# EAGLE board FTDI_SmartBasic-GiantPanel-v11 (EAGLE 6.6.0), part 1 of 12
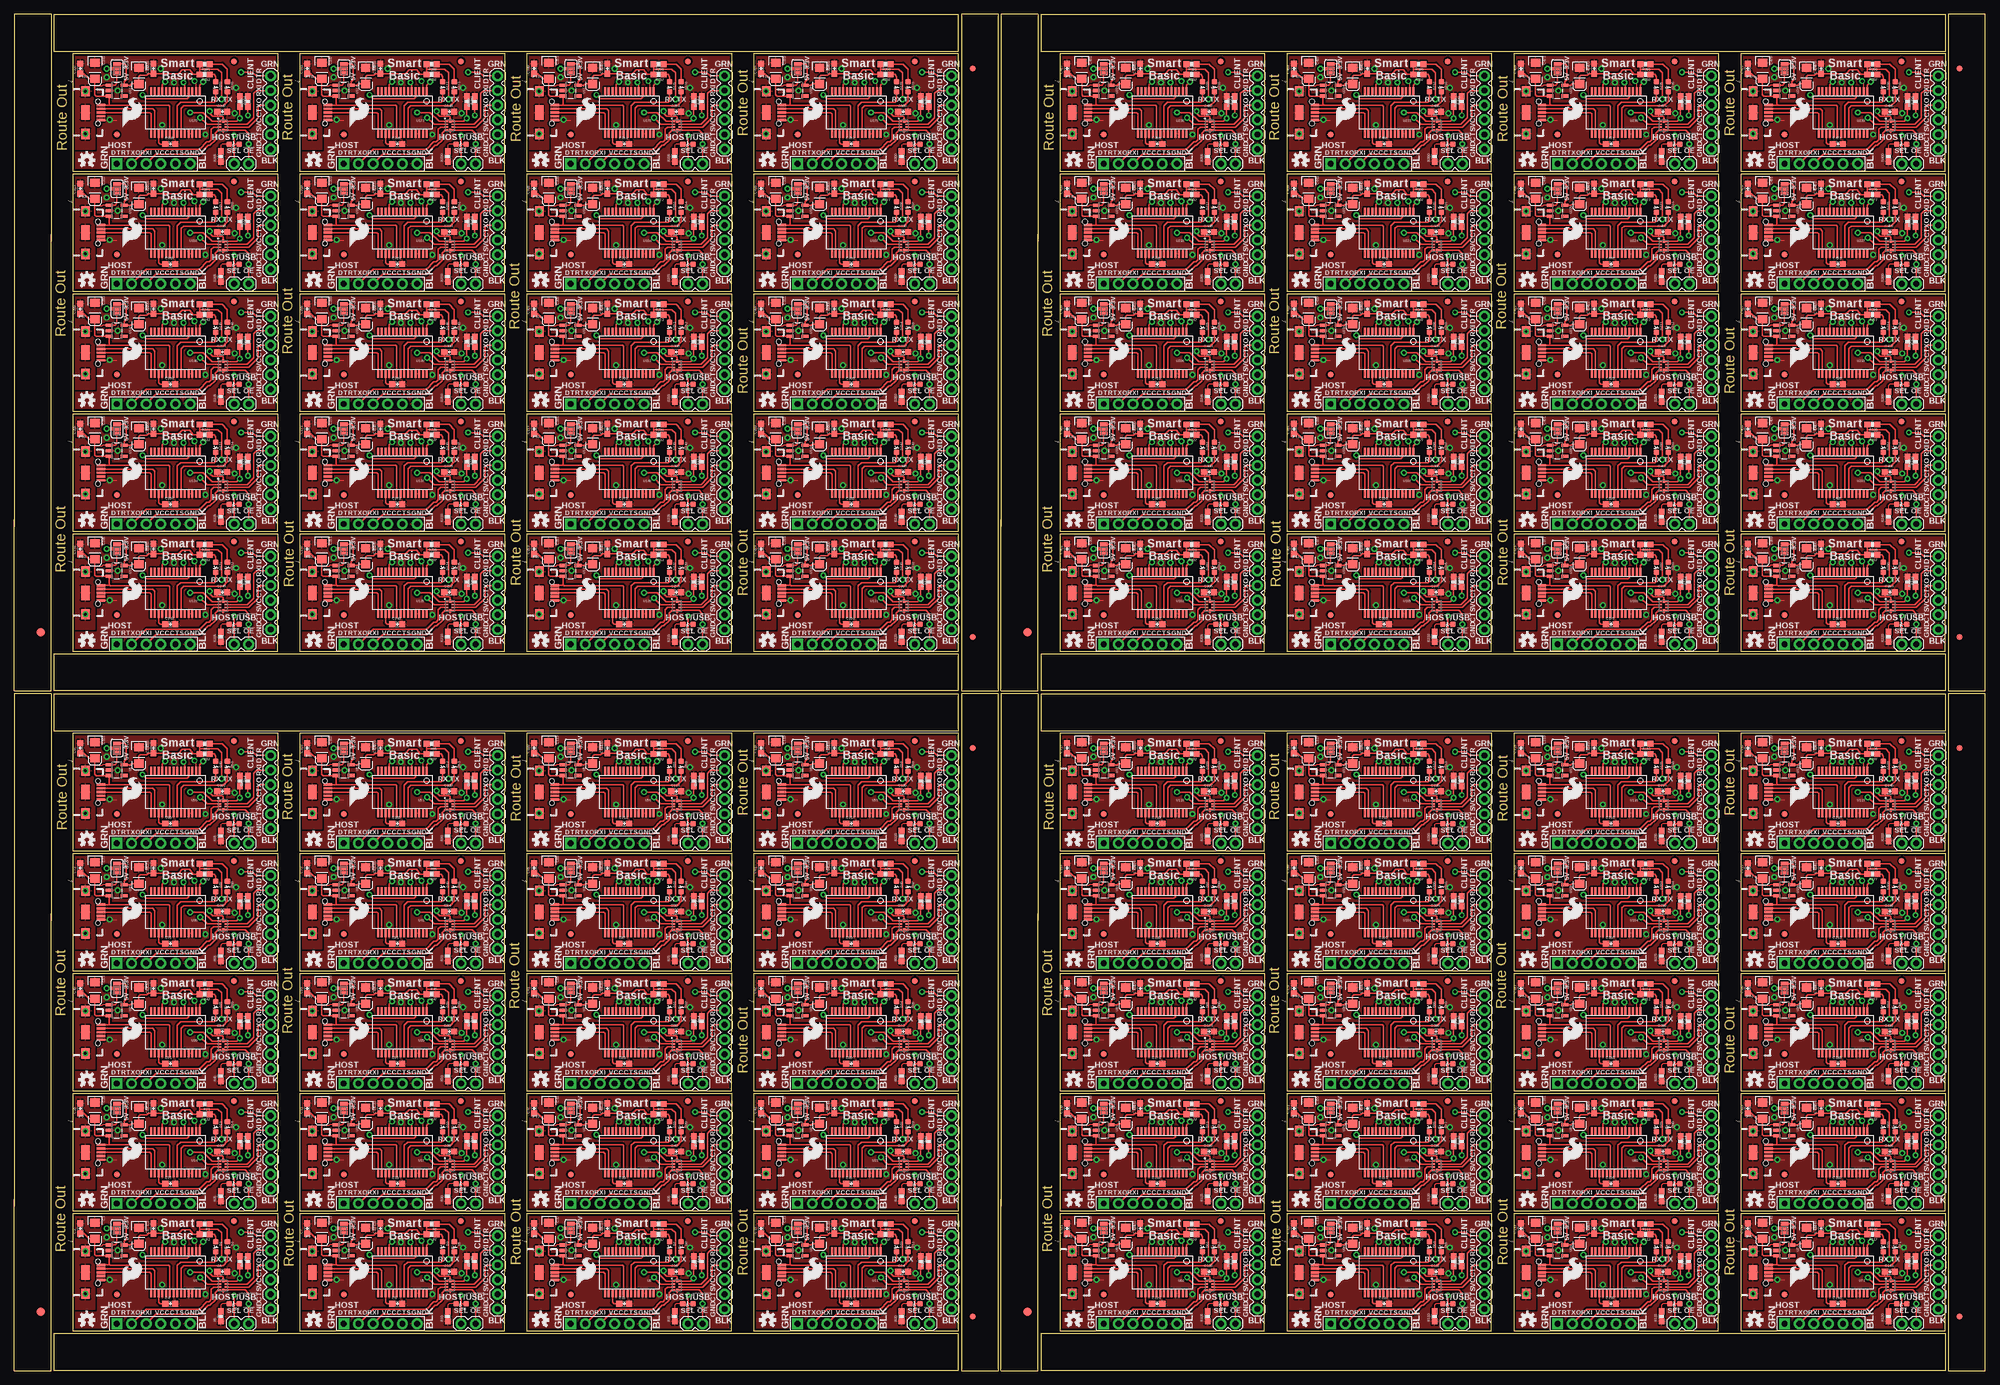
[diagram p0: board, top side]
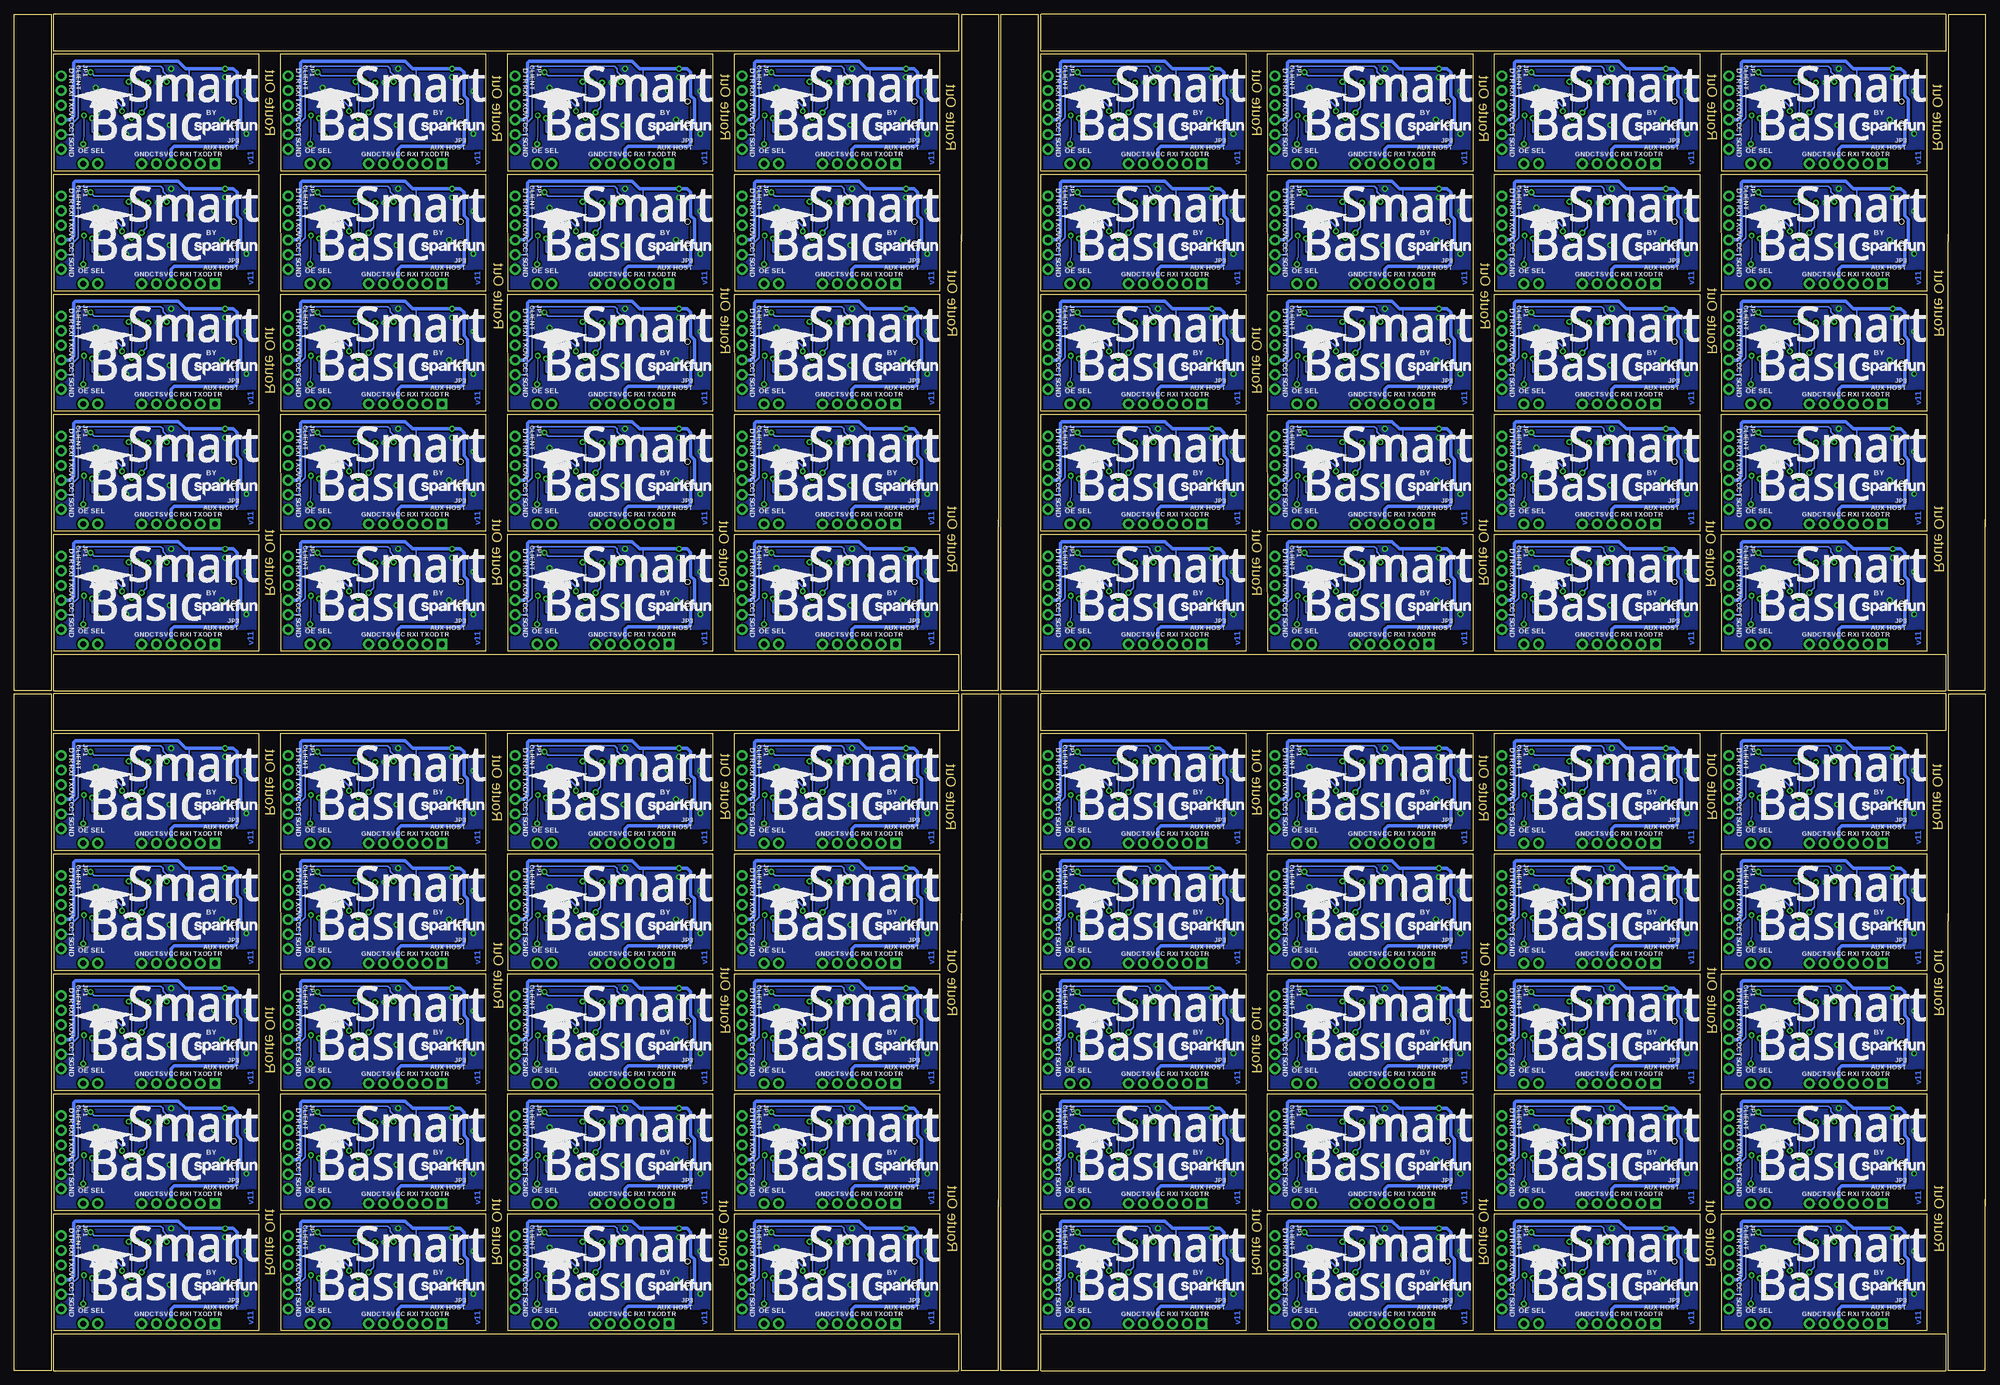
[diagram p1: board, bottom side, seen from below]

Size 341.88 x 235.2 mm. Coordinates in mm from the lower left corner, seen from the top.
Outline: 392 segments
Copper layers (1*16): Top 0.035mm / dielectric 1.5mm / Bottom 0.035mm
Design rules "Sparkfun *": minimum track width 8mil, minimum drill 20mil, track to track 8mil, track to pad 8mil, pad to pad 8mil, via to via 8mil, smd to smd 8mil, copper to edge 8mil, drill to drill 8mil, minimum pad ring 12mil, minimum via ring 10mil, stop-mask expansion 4mil, vias tented up to drill 20mil, thermal gap 10mil

## Footprints (pad centres in the part's own frame; a part is rotated, then mirrored left to right if it is on the bottom)
EIA3216 = smd 1.4 x 1.6: A 1.4,0; C -1.4,0
0603-CAP = smd 1.1 x 1: 1 -0.85,0; 2 0.85,0
FTDI_BASIC = drill 1.016 pad 1.88: CTS 10.16,0; DTR 0,0; GND 12.7,0; RXI 2.54,0; TXO 5.08,0; VCC 7.62,0
LED-0603 = smd 1 x 1: A 0,-0.877; C 0,0.877
FIDUCIAL-1.5X3 = smd 1.5 x 1.5: 1 0,0
FIDUCIAL-1X2 = smd 1 x 1: 1 0,0
FTDI_DEVICE_SIDE = drill 1.016 pad 1.88 square: P$1 -6.35,0 | drill 1.016 pad 1.88: P$2 -3.81,0; P$3 -1.27,0; P$4 1.27,0; P$5 3.81,0; P$6 6.35,0
USB-B-MICRO-SMD_V03 = smd 1.4 x 0.4: D+1 2.7,0; D-1 2.7,0.65; GND1 2.7,-1.3; ID1 2.7,-0.65; VBUS1 2.7,1.3 | smd 1.5 x 1.8: SHIELD1 0,3.7; SHIELD2 0,-3.7 | smd 1.5 x 2.5: SHIELD3 0,0 | hole 0.85: 2.2,1.9; 2.2,-1.9
1X02 = drill 1.016 pad 1.88: 1 0,0; 2 2.54,0
0603-RES = smd 1.1 x 1: 1 -0.85,0; 2 0.85,0
PAD-JUMPER-3-2OF3_NC_BY_PASTE_YES_SILK_FULL_BOX = smd 0.635 x 1.27: 1 -0.813,0; 2 0,0; 3 0.813,0
SSOP28DB = smd 0.348 x 1.397: 1 -4.225,-3.656; 2 -3.575,-3.656; 3 -2.925,-3.656; 4 -2.275,-3.656; 5 -1.625,-3.656; 6 -0.975,-3.656; 7 -0.325,-3.656; 8 0.325,-3.656; 9 0.975,-3.656; 10 1.625,-3.656; 11 2.275,-3.656; 12 2.925,-3.656; 13 3.575,-3.656; 14 4.225,-3.656; 15 4.225,3.656; 16 3.575,3.656; 17 2.925,3.656; 18 2.275,3.656; 19 1.625,3.656; 20 0.975,3.656; 21 0.325,3.656; 22 -0.325,3.656; 23 -0.975,3.656; 24 -1.625,3.656; 25 -2.275,3.656; 26 -2.925,3.656; 27 -3.575,3.656; 28 -4.225,3.656
SOT23-5 = smd 0.55 x 1.2: 1 -0.95,-1.3; 2 0,-1.3; 3 0.95,-1.3; 4 0.95,1.3; 5 -0.95,1.3
QFN-10-RSE = smd 0.58 x 0.25: 1 -0.6,0.75; 2 -0.6,0.25; 3 -0.6,-0.25; 4 -0.6,-0.75; 6 0.6,-0.75; 7 0.6,-0.25; 8 0.6,0.25; 9 0.6,0.75 | smd 0.35 x 0.63: 5 0,-0.85; 10 0,0.85

## Placement (x,y rotation side)
C1  10uF  [EIA3216]  13.97,24.26 270 top
C2  0.1uF  [0603-CAP]  11.43,24.64 90 top
C3  10uF  [EIA3216]  21.59,23.37 270 top
C4  0.1uF  [0603-CAP]  27.05,11.56 0 top
C5  0.1uF  [0603-CAP]  24.13,24.64 90 top
C6  0.1uF  [0603-CAP]  36.07,17.14 0 top
C7  0.1uF  [0603-CAP]  50.8,24.64 90 top
C8  10uF  [EIA3216]  60.96,23.37 270 top
C9  0.1uF  [0603-CAP]  66.42,11.56 0 top
C10  0.1uF  [0603-CAP]  63.5,24.64 90 top
C11  10uF  [EIA3216]  53.34,24.26 270 top
C12  0.1uF  [0603-CAP]  75.44,17.14 0 top
C13  0.1uF  [0603-CAP]  90.17,24.64 90 top
C14  10uF  [EIA3216]  100.33,23.37 270 top
C15  0.1uF  [0603-CAP]  105.79,11.56 0 top
C16  0.1uF  [0603-CAP]  102.87,24.64 90 top
C17  10uF  [EIA3216]  92.71,24.26 270 top
C18  0.1uF  [0603-CAP]  114.81,17.14 0 top
C19  0.1uF  [0603-CAP]  129.54,24.64 90 top
C20  10uF  [EIA3216]  139.7,23.37 270 top
C21  0.1uF  [0603-CAP]  145.16,11.56 0 top
C22  0.1uF  [0603-CAP]  142.24,24.64 90 top
C23  10uF  [EIA3216]  132.08,24.26 270 top
C24  0.1uF  [0603-CAP]  154.18,17.14 0 top
C25  0.1uF  [0603-CAP]  11.43,45.47 90 top
C26  10uF  [EIA3216]  21.59,44.2 270 top
C27  0.1uF  [0603-CAP]  27.05,32.38 0 top
C28  0.1uF  [0603-CAP]  24.13,45.47 90 top
C29  10uF  [EIA3216]  13.97,45.09 270 top
C30  0.1uF  [0603-CAP]  36.07,37.97 0 top
C31  0.1uF  [0603-CAP]  50.8,45.47 90 top
C32  10uF  [EIA3216]  60.96,44.2 270 top
C33  0.1uF  [0603-CAP]  66.42,32.38 0 top
C34  0.1uF  [0603-CAP]  63.5,45.47 90 top
C35  10uF  [EIA3216]  53.34,45.09 270 top
C36  0.1uF  [0603-CAP]  75.44,37.97 0 top
C37  0.1uF  [0603-CAP]  90.17,45.47 90 top
C38  10uF  [EIA3216]  100.33,44.2 270 top
C39  0.1uF  [0603-CAP]  105.79,32.38 0 top
C40  0.1uF  [0603-CAP]  102.87,45.47 90 top
C41  10uF  [EIA3216]  92.71,45.09 270 top
C42  0.1uF  [0603-CAP]  114.81,37.97 0 top
C43  0.1uF  [0603-CAP]  129.54,45.47 90 top
C44  10uF  [EIA3216]  139.7,44.2 270 top
C45  0.1uF  [0603-CAP]  145.16,32.38 0 top
C46  0.1uF  [0603-CAP]  142.24,45.47 90 top
C47  10uF  [EIA3216]  132.08,45.09 270 top
C48  0.1uF  [0603-CAP]  154.18,37.97 0 top
C49  0.1uF  [0603-CAP]  11.43,66.29 90 top
C50  10uF  [EIA3216]  21.59,65.02 270 top
C51  0.1uF  [0603-CAP]  27.05,53.21 0 top
C52  0.1uF  [0603-CAP]  24.13,66.29 90 top
C53  10uF  [EIA3216]  13.97,65.91 270 top
C54  0.1uF  [0603-CAP]  36.07,58.8 0 top
C55  0.1uF  [0603-CAP]  50.8,66.29 90 top
C56  10uF  [EIA3216]  60.96,65.02 270 top
C57  0.1uF  [0603-CAP]  66.42,53.21 0 top
C58  0.1uF  [0603-CAP]  63.5,66.29 90 top
C59  10uF  [EIA3216]  53.34,65.91 270 top
C60  0.1uF  [0603-CAP]  75.44,58.8 0 top
C61  0.1uF  [0603-CAP]  90.17,66.29 90 top
C62  10uF  [EIA3216]  100.33,65.02 270 top
C63  0.1uF  [0603-CAP]  105.79,53.21 0 top
C64  0.1uF  [0603-CAP]  102.87,66.29 90 top
C65  10uF  [EIA3216]  92.71,65.91 270 top
C66  0.1uF  [0603-CAP]  114.81,58.8 0 top
C67  0.1uF  [0603-CAP]  129.54,66.29 90 top
C68  10uF  [EIA3216]  139.7,65.02 270 top
C69  0.1uF  [0603-CAP]  145.16,53.21 0 top
C70  0.1uF  [0603-CAP]  142.24,66.29 90 top
C71  10uF  [EIA3216]  132.08,65.91 270 top
C72  0.1uF  [0603-CAP]  154.18,58.8 0 top
C73  0.1uF  [0603-CAP]  11.43,87.12 90 top
C74  10uF  [EIA3216]  21.59,85.85 270 top
C75  0.1uF  [0603-CAP]  27.05,74.04 0 top
C76  0.1uF  [0603-CAP]  24.13,87.12 90 top
C77  10uF  [EIA3216]  13.97,86.74 270 top
C78  0.1uF  [0603-CAP]  36.07,79.63 0 top
C79  0.1uF  [0603-CAP]  50.8,87.12 90 top
C80  10uF  [EIA3216]  60.96,85.85 270 top
C81  0.1uF  [0603-CAP]  66.42,74.04 0 top
C82  0.1uF  [0603-CAP]  63.5,87.12 90 top
C83  10uF  [EIA3216]  53.34,86.74 270 top
C84  0.1uF  [0603-CAP]  75.44,79.63 0 top
C85  0.1uF  [0603-CAP]  90.17,87.12 90 top
C86  10uF  [EIA3216]  100.33,85.85 270 top
C87  0.1uF  [0603-CAP]  105.79,74.04 0 top
C88  0.1uF  [0603-CAP]  102.87,87.12 90 top
C89  10uF  [EIA3216]  92.71,86.74 270 top
C90  0.1uF  [0603-CAP]  114.81,79.63 0 top
C91  0.1uF  [0603-CAP]  129.54,87.12 90 top
C92  10uF  [EIA3216]  139.7,85.85 270 top
C93  0.1uF  [0603-CAP]  145.16,74.04 0 top
C94  0.1uF  [0603-CAP]  142.24,87.12 90 top
C95  10uF  [EIA3216]  132.08,86.74 270 top
C96  0.1uF  [0603-CAP]  154.18,79.63 0 top
C97  0.1uF  [0603-CAP]  11.43,107.95 90 top
C98  10uF  [EIA3216]  21.59,106.68 270 top
C99  0.1uF  [0603-CAP]  27.05,94.87 0 top
C100  0.1uF  [0603-CAP]  24.13,107.95 90 top
C101  10uF  [EIA3216]  13.97,107.57 270 top
C102  0.1uF  [0603-CAP]  36.07,100.46 0 top
C103  0.1uF  [0603-CAP]  50.8,107.95 90 top
C104  10uF  [EIA3216]  60.96,106.68 270 top
C105  0.1uF  [0603-CAP]  66.42,94.87 0 top
C106  0.1uF  [0603-CAP]  63.5,107.95 90 top
C107  10uF  [EIA3216]  53.34,107.57 270 top
C108  0.1uF  [0603-CAP]  75.44,100.46 0 top
C109  0.1uF  [0603-CAP]  90.17,107.95 90 top
C110  10uF  [EIA3216]  100.33,106.68 270 top
C111  0.1uF  [0603-CAP]  105.79,94.87 0 top
C112  0.1uF  [0603-CAP]  102.87,107.95 90 top
C113  10uF  [EIA3216]  92.71,107.57 270 top
C114  0.1uF  [0603-CAP]  114.81,100.46 0 top
C115  0.1uF  [0603-CAP]  129.54,107.95 90 top
C116  10uF  [EIA3216]  139.7,106.68 270 top
C117  0.1uF  [0603-CAP]  145.16,94.87 0 top
C118  0.1uF  [0603-CAP]  142.24,107.95 90 top
C119  10uF  [EIA3216]  132.08,107.57 270 top
C120  0.1uF  [0603-CAP]  154.18,100.46 0 top
C121  0.1uF  [0603-CAP]  182.63,24.64 90 top
C122  10uF  [EIA3216]  192.79,23.37 270 top
C123  0.1uF  [0603-CAP]  198.25,11.56 0 top
C124  0.1uF  [0603-CAP]  195.33,24.64 90 top
C125  10uF  [EIA3216]  185.17,24.26 270 top
C126  0.1uF  [0603-CAP]  207.26,17.14 0 top
C127  0.1uF  [0603-CAP]  222,24.64 90 top
C128  10uF  [EIA3216]  232.16,23.37 270 top
C129  0.1uF  [0603-CAP]  237.62,11.56 0 top
C130  0.1uF  [0603-CAP]  234.7,24.64 90 top
C131  10uF  [EIA3216]  224.54,24.26 270 top
C132  0.1uF  [0603-CAP]  246.63,17.14 0 top
C133  0.1uF  [0603-CAP]  261.37,24.64 90 top
C134  10uF  [EIA3216]  271.53,23.37 270 top
C135  0.1uF  [0603-CAP]  276.99,11.56 0 top
C136  0.1uF  [0603-CAP]  274.07,24.64 90 top
C137  10uF  [EIA3216]  263.91,24.26 270 top
C138  0.1uF  [0603-CAP]  286,17.14 0 top
C139  0.1uF  [0603-CAP]  300.74,24.64 90 top
C140  10uF  [EIA3216]  310.9,23.37 270 top
C141  0.1uF  [0603-CAP]  316.36,11.56 0 top
C142  0.1uF  [0603-CAP]  313.44,24.64 90 top
C143  10uF  [EIA3216]  303.28,24.26 270 top
C144  0.1uF  [0603-CAP]  325.37,17.14 0 top
C145  0.1uF  [0603-CAP]  182.63,45.47 90 top
C146  10uF  [EIA3216]  192.79,44.2 270 top
C147  0.1uF  [0603-CAP]  198.25,32.38 0 top
C148  0.1uF  [0603-CAP]  195.33,45.47 90 top
C149  10uF  [EIA3216]  185.17,45.09 270 top
C150  0.1uF  [0603-CAP]  207.26,37.97 0 top
C151  0.1uF  [0603-CAP]  222,45.47 90 top
C152  10uF  [EIA3216]  232.16,44.2 270 top
C153  0.1uF  [0603-CAP]  237.62,32.38 0 top
C154  0.1uF  [0603-CAP]  234.7,45.47 90 top
C155  10uF  [EIA3216]  224.54,45.09 270 top
C156  0.1uF  [0603-CAP]  246.63,37.97 0 top
C157  0.1uF  [0603-CAP]  261.37,45.47 90 top
C158  10uF  [EIA3216]  271.53,44.2 270 top
C159  0.1uF  [0603-CAP]  276.99,32.38 0 top
C160  0.1uF  [0603-CAP]  274.07,45.47 90 top
C161  10uF  [EIA3216]  263.91,45.09 270 top
C162  0.1uF  [0603-CAP]  286,37.97 0 top
C163  0.1uF  [0603-CAP]  300.74,45.47 90 top
C164  10uF  [EIA3216]  310.9,44.2 270 top
C165  0.1uF  [0603-CAP]  316.36,32.38 0 top
C166  0.1uF  [0603-CAP]  313.44,45.47 90 top
C167  10uF  [EIA3216]  303.28,45.09 270 top
C168  0.1uF  [0603-CAP]  325.37,37.97 0 top
C169  0.1uF  [0603-CAP]  182.63,66.29 90 top
C170  10uF  [EIA3216]  192.79,65.02 270 top
C171  0.1uF  [0603-CAP]  198.25,53.21 0 top
C172  0.1uF  [0603-CAP]  195.33,66.29 90 top
C173  10uF  [EIA3216]  185.17,65.91 270 top
C174  0.1uF  [0603-CAP]  207.26,58.8 0 top
C175  0.1uF  [0603-CAP]  222,66.29 90 top
C176  10uF  [EIA3216]  232.16,65.02 270 top
C177  0.1uF  [0603-CAP]  237.62,53.21 0 top
C178  0.1uF  [0603-CAP]  234.7,66.29 90 top
C179  10uF  [EIA3216]  224.54,65.91 270 top
C180  0.1uF  [0603-CAP]  246.63,58.8 0 top
C181  0.1uF  [0603-CAP]  261.37,66.29 90 top
C182  10uF  [EIA3216]  271.53,65.02 270 top
C183  0.1uF  [0603-CAP]  276.99,53.21 0 top
C184  0.1uF  [0603-CAP]  274.07,66.29 90 top
C185  10uF  [EIA3216]  263.91,65.91 270 top
C186  0.1uF  [0603-CAP]  286,58.8 0 top
C187  0.1uF  [0603-CAP]  300.74,66.29 90 top
C188  10uF  [EIA3216]  310.9,65.02 270 top
C189  0.1uF  [0603-CAP]  316.36,53.21 0 top
C190  0.1uF  [0603-CAP]  313.44,66.29 90 top
C191  10uF  [EIA3216]  303.28,65.91 270 top
C192  0.1uF  [0603-CAP]  325.37,58.8 0 top
C193  0.1uF  [0603-CAP]  182.63,87.12 90 top
C194  10uF  [EIA3216]  192.79,85.85 270 top
C195  0.1uF  [0603-CAP]  198.25,74.04 0 top
C196  0.1uF  [0603-CAP]  195.33,87.12 90 top
C197  10uF  [EIA3216]  185.17,86.74 270 top
C198  0.1uF  [0603-CAP]  207.26,79.63 0 top
C199  0.1uF  [0603-CAP]  222,87.12 90 top
C200  10uF  [EIA3216]  232.16,85.85 270 top
C201  0.1uF  [0603-CAP]  237.62,74.04 0 top
C202  0.1uF  [0603-CAP]  234.7,87.12 90 top
C203  10uF  [EIA3216]  224.54,86.74 270 top
C204  0.1uF  [0603-CAP]  246.63,79.63 0 top
C205  0.1uF  [0603-CAP]  261.37,87.12 90 top
C206  10uF  [EIA3216]  271.53,85.85 270 top
C207  0.1uF  [0603-CAP]  276.99,74.04 0 top
C208  0.1uF  [0603-CAP]  274.07,87.12 90 top
C209  10uF  [EIA3216]  263.91,86.74 270 top
C210  0.1uF  [0603-CAP]  286,79.63 0 top
C211  0.1uF  [0603-CAP]  300.74,87.12 90 top
C212  10uF  [EIA3216]  310.9,85.85 270 top
C213  0.1uF  [0603-CAP]  316.36,74.04 0 top
C214  0.1uF  [0603-CAP]  313.44,87.12 90 top
C215  10uF  [EIA3216]  303.28,86.74 270 top
C216  0.1uF  [0603-CAP]  325.37,79.63 0 top
C217  0.1uF  [0603-CAP]  182.63,107.95 90 top
C218  10uF  [EIA3216]  192.79,106.68 270 top
C219  0.1uF  [0603-CAP]  198.25,94.87 0 top
C220  0.1uF  [0603-CAP]  195.33,107.95 90 top
C221  10uF  [EIA3216]  185.17,107.57 270 top
C222  0.1uF  [0603-CAP]  207.26,100.46 0 top
C223  0.1uF  [0603-CAP]  222,107.95 90 top
C224  10uF  [EIA3216]  232.16,106.68 270 top
C225  0.1uF  [0603-CAP]  237.62,94.87 0 top
C226  0.1uF  [0603-CAP]  234.7,107.95 90 top
C227  10uF  [EIA3216]  224.54,107.57 270 top
C228  0.1uF  [0603-CAP]  246.63,100.46 0 top
C229  0.1uF  [0603-CAP]  261.37,107.95 90 top
C230  10uF  [EIA3216]  271.53,106.68 270 top
C231  0.1uF  [0603-CAP]  276.99,94.87 0 top
C232  0.1uF  [0603-CAP]  274.07,107.95 90 top
C233  10uF  [EIA3216]  263.91,107.57 270 top
C234  0.1uF  [0603-CAP]  286,100.46 0 top
C235  0.1uF  [0603-CAP]  300.74,107.95 90 top
C236  10uF  [EIA3216]  310.9,106.68 270 top
C237  0.1uF  [0603-CAP]  316.36,94.87 0 top
C238  0.1uF  [0603-CAP]  313.44,107.95 90 top
C239  10uF  [EIA3216]  303.28,107.57 270 top
C240  0.1uF  [0603-CAP]  325.37,100.46 0 top
C241  0.1uF  [0603-CAP]  11.43,142.49 90 top
C242  10uF  [EIA3216]  21.59,141.22 270 top
C243  0.1uF  [0603-CAP]  27.05,129.41 0 top
C244  0.1uF  [0603-CAP]  24.13,142.49 90 top
C245  10uF  [EIA3216]  13.97,142.11 270 top
C246  0.1uF  [0603-CAP]  36.07,135 0 top
C247  0.1uF  [0603-CAP]  50.8,142.49 90 top
C248  10uF  [EIA3216]  60.96,141.22 270 top
C249  0.1uF  [0603-CAP]  66.42,129.41 0 top
C250  0.1uF  [0603-CAP]  63.5,142.49 90 top
C251  10uF  [EIA3216]  53.34,142.11 270 top
C252  0.1uF  [0603-CAP]  75.44,135 0 top
C253  0.1uF  [0603-CAP]  90.17,142.49 90 top
C254  10uF  [EIA3216]  100.33,141.22 270 top
C255  0.1uF  [0603-CAP]  105.79,129.41 0 top
C256  0.1uF  [0603-CAP]  102.87,142.49 90 top
C257  10uF  [EIA3216]  92.71,142.11 270 top
C258  0.1uF  [0603-CAP]  114.81,135 0 top
C259  0.1uF  [0603-CAP]  129.54,142.49 90 top
C260  10uF  [EIA3216]  139.7,141.22 270 top
C261  0.1uF  [0603-CAP]  145.16,129.41 0 top
C262  0.1uF  [0603-CAP]  142.24,142.49 90 top
C263  10uF  [EIA3216]  132.08,142.11 270 top
C264  0.1uF  [0603-CAP]  154.18,135 0 top
C265  0.1uF  [0603-CAP]  11.43,163.32 90 top
C266  10uF  [EIA3216]  21.59,162.05 270 top
C267  0.1uF  [0603-CAP]  27.05,150.24 0 top
C268  0.1uF  [0603-CAP]  24.13,163.32 90 top
C269  10uF  [EIA3216]  13.97,162.94 270 top
C270  0.1uF  [0603-CAP]  36.07,155.83 0 top
C271  0.1uF  [0603-CAP]  50.8,163.32 90 top
C272  10uF  [EIA3216]  60.96,162.05 270 top
C273  0.1uF  [0603-CAP]  66.42,150.24 0 top
C274  0.1uF  [0603-CAP]  63.5,163.32 90 top
C275  10uF  [EIA3216]  53.34,162.94 270 top
C276  0.1uF  [0603-CAP]  75.44,155.83 0 top
C277  0.1uF  [0603-CAP]  90.17,163.32 90 top
C278  10uF  [EIA3216]  100.33,162.05 270 top
C279  0.1uF  [0603-CAP]  105.79,150.24 0 top
C280  0.1uF  [0603-CAP]  102.87,163.32 90 top
C281  10uF  [EIA3216]  92.71,162.94 270 top
C282  0.1uF  [0603-CAP]  114.81,155.83 0 top
C283  0.1uF  [0603-CAP]  129.54,163.32 90 top
C284  10uF  [EIA3216]  139.7,162.05 270 top
C285  0.1uF  [0603-CAP]  145.16,150.24 0 top
C286  0.1uF  [0603-CAP]  142.24,163.32 90 top
C287  10uF  [EIA3216]  132.08,162.94 270 top
C288  0.1uF  [0603-CAP]  154.18,155.83 0 top
C289  0.1uF  [0603-CAP]  11.43,184.15 90 top
C290  10uF  [EIA3216]  21.59,182.88 270 top
C291  0.1uF  [0603-CAP]  27.05,171.07 0 top
C292  0.1uF  [0603-CAP]  24.13,184.15 90 top
C293  10uF  [EIA3216]  13.97,183.77 270 top
C294  0.1uF  [0603-CAP]  36.07,176.66 0 top
C295  0.1uF  [0603-CAP]  50.8,184.15 90 top
C296  10uF  [EIA3216]  60.96,182.88 270 top
C297  0.1uF  [0603-CAP]  66.42,171.07 0 top
C298  0.1uF  [0603-CAP]  63.5,184.15 90 top
C299  10uF  [EIA3216]  53.34,183.77 270 top
C300  0.1uF  [0603-CAP]  75.44,176.66 0 top
C301  0.1uF  [0603-CAP]  90.17,184.15 90 top
C302  10uF  [EIA3216]  100.33,182.88 270 top
C303  0.1uF  [0603-CAP]  105.79,171.07 0 top
C304  0.1uF  [0603-CAP]  102.87,184.15 90 top
C305  10uF  [EIA3216]  92.71,183.77 270 top
C306  0.1uF  [0603-CAP]  114.81,176.66 0 top
C307  0.1uF  [0603-CAP]  129.54,184.15 90 top
C308  10uF  [EIA3216]  139.7,182.88 270 top
C309  0.1uF  [0603-CAP]  145.16,171.07 0 top
C310  0.1uF  [0603-CAP]  142.24,184.15 90 top
C311  10uF  [EIA3216]  132.08,183.77 270 top
C312  0.1uF  [0603-CAP]  154.18,176.66 0 top
C313  0.1uF  [0603-CAP]  11.43,204.98 90 top
C314  10uF  [EIA3216]  21.59,203.71 270 top
C315  0.1uF  [0603-CAP]  27.05,191.9 0 top
C316  0.1uF  [0603-CAP]  24.13,204.98 90 top
C317  10uF  [EIA3216]  13.97,204.6 270 top
C318  0.1uF  [0603-CAP]  36.07,197.49 0 top
C319  0.1uF  [0603-CAP]  50.8,204.98 90 top
C320  10uF  [EIA3216]  60.96,203.71 270 top
C321  0.1uF  [0603-CAP]  66.42,191.9 0 top
C322  0.1uF  [0603-CAP]  63.5,204.98 90 top
C323  10uF  [EIA3216]  53.34,204.6 270 top
C324  0.1uF  [0603-CAP]  75.44,197.49 0 top
C325  0.1uF  [0603-CAP]  90.17,204.98 90 top
C326  10uF  [EIA3216]  100.33,203.71 270 top
C327  0.1uF  [0603-CAP]  105.79,191.9 0 top
C328  0.1uF  [0603-CAP]  102.87,204.98 90 top
C329  10uF  [EIA3216]  92.71,204.6 270 top
C330  0.1uF  [0603-CAP]  114.81,197.49 0 top
C331  0.1uF  [0603-CAP]  129.54,204.98 90 top
C332  10uF  [EIA3216]  139.7,203.71 270 top
C333  0.1uF  [0603-CAP]  145.16,191.9 0 top
C334  0.1uF  [0603-CAP]  142.24,204.98 90 top
C335  10uF  [EIA3216]  132.08,204.6 270 top
C336  0.1uF  [0603-CAP]  154.18,197.49 0 top
C337  0.1uF  [0603-CAP]  11.43,225.81 90 top
C338  10uF  [EIA3216]  21.59,224.54 270 top
C339  0.1uF  [0603-CAP]  27.05,212.72 0 top
C340  0.1uF  [0603-CAP]  24.13,225.81 90 top
C341  10uF  [EIA3216]  13.97,225.43 270 top
C342  0.1uF  [0603-CAP]  36.07,218.31 0 top
C343  0.1uF  [0603-CAP]  50.8,225.81 90 top
C344  10uF  [EIA3216]  60.96,224.54 270 top
C345  0.1uF  [0603-CAP]  66.42,212.72 0 top
C346  0.1uF  [0603-CAP]  63.5,225.81 90 top
C347  10uF  [EIA3216]  53.34,225.43 270 top
C348  0.1uF  [0603-CAP]  75.44,218.31 0 top
C349  0.1uF  [0603-CAP]  90.17,225.81 90 top
C350  10uF  [EIA3216]  100.33,224.54 270 top
C351  0.1uF  [0603-CAP]  105.79,212.72 0 top
C352  0.1uF  [0603-CAP]  102.87,225.81 90 top
C353  10uF  [EIA3216]  92.71,225.43 270 top
C354  0.1uF  [0603-CAP]  114.81,218.31 0 top
C355  0.1uF  [0603-CAP]  129.54,225.81 90 top
C356  10uF  [EIA3216]  139.7,224.54 270 top
C357  0.1uF  [0603-CAP]  145.16,212.72 0 top
C358  0.1uF  [0603-CAP]  142.24,225.81 90 top
C359  10uF  [EIA3216]  132.08,225.43 270 top
C360  0.1uF  [0603-CAP]  154.18,218.31 0 top
C361  0.1uF  [0603-CAP]  182.63,142.49 90 top
C362  10uF  [EIA3216]  192.79,141.22 270 top
C363  0.1uF  [0603-CAP]  198.25,129.41 0 top
C364  0.1uF  [0603-CAP]  195.33,142.49 90 top
C365  10uF  [EIA3216]  185.17,142.11 270 top
C366  0.1uF  [0603-CAP]  207.26,135 0 top
C367  0.1uF  [0603-CAP]  222,142.49 90 top
C368  10uF  [EIA3216]  232.16,141.22 270 top
C369  0.1uF  [0603-CAP]  237.62,129.41 0 top
C370  0.1uF  [0603-CAP]  234.7,142.49 90 top
C371  10uF  [EIA3216]  224.54,142.11 270 top
C372  0.1uF  [0603-CAP]  246.63,135 0 top
C373  0.1uF  [0603-CAP]  261.37,142.49 90 top
C374  10uF  [EIA3216]  271.53,141.22 270 top
C375  0.1uF  [0603-CAP]  276.99,129.41 0 top
C376  0.1uF  [0603-CAP]  274.07,142.49 90 top
C377  10uF  [EIA3216]  263.91,142.11 270 top
C378  0.1uF  [0603-CAP]  286,135 0 top
C379  0.1uF  [0603-CAP]  300.74,142.49 90 top
C380  10uF  [EIA3216]  310.9,141.22 270 top
C381  0.1uF  [0603-CAP]  316.36,129.41 0 top
C382  0.1uF  [0603-CAP]  313.44,142.49 90 top
C383  10uF  [EIA3216]  303.28,142.11 270 top
C384  0.1uF  [0603-CAP]  325.37,135 0 top
C385  0.1uF  [0603-CAP]  182.63,163.32 90 top
C386  10uF  [EIA3216]  192.79,162.05 270 top
C387  0.1uF  [0603-CAP]  198.25,150.24 0 top
C388  0.1uF  [0603-CAP]  195.33,163.32 90 top
C389  10uF  [EIA3216]  185.17,162.94 270 top
C390  0.1uF  [0603-CAP]  207.26,155.83 0 top
C391  0.1uF  [0603-CAP]  222,163.32 90 top
C392  10uF  [EIA3216]  232.16,162.05 270 top
C393  0.1uF  [0603-CAP]  237.62,150.24 0 top
C394  0.1uF  [0603-CAP]  234.7,163.32 90 top
C395  10uF  [EIA3216]  224.54,162.94 270 top
C396  0.1uF  [0603-CAP]  246.63,155.83 0 top
C397  0.1uF  [0603-CAP]  261.37,163.32 90 top
C398  10uF  [EIA3216]  271.53,162.05 270 top
C399  0.1uF  [0603-CAP]  276.99,150.24 0 top
C400  0.1uF  [0603-CAP]  274.07,163.32 90 top
C401  10uF  [EIA3216]  263.91,162.94 270 top
C402  0.1uF  [0603-CAP]  286,155.83 0 top
C403  0.1uF  [0603-CAP]  300.74,163.32 90 top
C404  10uF  [EIA3216]  310.9,162.05 270 top
C405  0.1uF  [0603-CAP]  316.36,150.24 0 top
C406  0.1uF  [0603-CAP]  313.44,163.32 90 top
C407  10uF  [EIA3216]  303.28,162.94 270 top
C408  0.1uF  [0603-CAP]  325.37,155.83 0 top
C409  0.1uF  [0603-CAP]  182.63,184.15 90 top
C410  10uF  [EIA3216]  192.79,182.88 270 top
C411  0.1uF  [0603-CAP]  198.25,171.07 0 top
C412  0.1uF  [0603-CAP]  195.33,184.15 90 top
C413  10uF  [EIA3216]  185.17,183.77 270 top
C414  0.1uF  [0603-CAP]  207.26,176.66 0 top
C415  0.1uF  [0603-CAP]  222,184.15 90 top
C416  10uF  [EIA3216]  232.16,182.88 270 top
C417  0.1uF  [0603-CAP]  237.62,171.07 0 top
C418  0.1uF  [0603-CAP]  234.7,184.15 90 top
C419  10uF  [EIA3216]  224.54,183.77 270 top
C420  0.1uF  [0603-CAP]  246.63,176.66 0 top
C421  0.1uF  [0603-CAP]  261.37,184.15 90 top
C422  10uF  [EIA3216]  271.53,182.88 270 top
C423  0.1uF  [0603-CAP]  276.99,171.07 0 top
C424  0.1uF  [0603-CAP]  274.07,184.15 90 top
C425  10uF  [EIA3216]  263.91,183.77 270 top
C426  0.1uF  [0603-CAP]  286,176.66 0 top
C427  0.1uF  [0603-CAP]  300.74,184.15 90 top
C428  10uF  [EIA3216]  310.9,182.88 270 top
C429  0.1uF  [0603-CAP]  316.36,171.07 0 top
C430  0.1uF  [0603-CAP]  313.44,184.15 90 top
C431  10uF  [EIA3216]  303.28,183.77 270 top
C432  0.1uF  [0603-CAP]  325.37,176.66 0 top
C433  0.1uF  [0603-CAP]  182.63,204.98 90 top
C434  10uF  [EIA3216]  192.79,203.71 270 top
C435  0.1uF  [0603-CAP]  198.25,191.9 0 top
C436  0.1uF  [0603-CAP]  195.33,204.98 90 top
C437  10uF  [EIA3216]  185.17,204.6 270 top
C438  0.1uF  [0603-CAP]  207.26,197.49 0 top
C439  0.1uF  [0603-CAP]  222,204.98 90 top
C440  10uF  [EIA3216]  232.16,203.71 270 top
C441  0.1uF  [0603-CAP]  237.62,191.9 0 top
C442  0.1uF  [0603-CAP]  234.7,204.98 90 top
C443  10uF  [EIA3216]  224.54,204.6 270 top
C444  0.1uF  [0603-CAP]  246.63,197.49 0 top
C445  0.1uF  [0603-CAP]  261.37,204.98 90 top
C446  10uF  [EIA3216]  271.53,203.71 270 top
C447  0.1uF  [0603-CAP]  276.99,191.9 0 top
C448  0.1uF  [0603-CAP]  274.07,204.98 90 top
C449  10uF  [EIA3216]  263.91,204.6 270 top
C450  0.1uF  [0603-CAP]  286,197.49 0 top
C451  0.1uF  [0603-CAP]  300.74,204.98 90 top
C452  10uF  [EIA3216]  310.9,203.71 270 top
C453  0.1uF  [0603-CAP]  316.36,191.9 0 top
C454  0.1uF  [0603-CAP]  313.44,204.98 90 top
C455  10uF  [EIA3216]  303.28,204.6 270 top
C456  0.1uF  [0603-CAP]  325.37,197.49 0 top
C457  0.1uF  [0603-CAP]  182.63,225.81 90 top
C458  10uF  [EIA3216]  192.79,224.54 270 top
C459  0.1uF  [0603-CAP]  198.25,212.72 0 top
C460  0.1uF  [0603-CAP]  195.33,225.81 90 top
C461  10uF  [EIA3216]  185.17,225.43 270 top
C462  0.1uF  [0603-CAP]  207.26,218.31 0 top
C463  0.1uF  [0603-CAP]  222,225.81 90 top
C464  10uF  [EIA3216]  232.16,224.54 270 top
C465  0.1uF  [0603-CAP]  237.62,212.72 0 top
C466  0.1uF  [0603-CAP]  234.7,225.81 90 top
C467  10uF  [EIA3216]  224.54,225.43 270 top
C468  0.1uF  [0603-CAP]  246.63,218.31 0 top
C469  0.1uF  [0603-CAP]  261.37,225.81 90 top
C470  10uF  [EIA3216]  271.53,224.54 270 top
C471  0.1uF  [0603-CAP]  276.99,212.72 0 top
C472  0.1uF  [0603-CAP]  274.07,225.81 90 top
C473  10uF  [EIA3216]  263.91,225.43 270 top
C474  0.1uF  [0603-CAP]  286,218.31 0 top
C475  0.1uF  [0603-CAP]  300.74,225.81 90 top
C476  10uF  [EIA3216]  310.9,224.54 270 top
C477  0.1uF  [0603-CAP]  316.36,212.72 0 top
C478  0.1uF  [0603-CAP]  313.44,225.81 90 top
C479  10uF  [EIA3216]  303.28,225.43 270 top
C480  0.1uF  [0603-CAP]  325.37,218.31 0 top
CLIENT  [FTDI_BASIC]  44.45,23.37 270 top
CLIENT1  [FTDI_BASIC]  83.82,23.37 270 top
CLIENT2  [FTDI_BASIC]  123.19,23.37 270 top
CLIENT3  [FTDI_BASIC]  162.56,23.37 270 top
CLIENT4  [FTDI_BASIC]  44.45,44.2 270 top
CLIENT5  [FTDI_BASIC]  83.82,44.2 270 top
CLIENT6  [FTDI_BASIC]  123.19,44.2 270 top
CLIENT7  [FTDI_BASIC]  162.56,44.2 270 top
CLIENT8  [FTDI_BASIC]  44.45,65.02 270 top
CLIENT9  [FTDI_BASIC]  83.82,65.02 270 top
CLIENT10  [FTDI_BASIC]  123.19,65.02 270 top
CLIENT11  [FTDI_BASIC]  162.56,65.02 270 top
CLIENT12  [FTDI_BASIC]  44.45,85.85 270 top
CLIENT13  [FTDI_BASIC]  83.82,85.85 270 top
CLIENT14  [FTDI_BASIC]  123.19,85.85 270 top
CLIENT15  [FTDI_BASIC]  162.56,85.85 270 top
CLIENT16  [FTDI_BASIC]  44.45,106.68 270 top
CLIENT17  [FTDI_BASIC]  83.82,106.68 270 top
CLIENT18  [FTDI_BASIC]  123.19,106.68 270 top
CLIENT19  [FTDI_BASIC]  162.56,106.68 270 top
CLIENT20  [FTDI_BASIC]  215.65,23.37 270 top
CLIENT21  [FTDI_BASIC]  255.02,23.37 270 top
CLIENT22  [FTDI_BASIC]  294.39,23.37 270 top
CLIENT23  [FTDI_BASIC]  333.76,23.37 270 top
CLIENT24  [FTDI_BASIC]  215.65,44.2 270 top
CLIENT25  [FTDI_BASIC]  255.02,44.2 270 top
CLIENT26  [FTDI_BASIC]  294.39,44.2 270 top
CLIENT27  [FTDI_BASIC]  333.76,44.2 270 top
CLIENT28  [FTDI_BASIC]  215.65,65.02 270 top
CLIENT29  [FTDI_BASIC]  255.02,65.02 270 top
CLIENT30  [FTDI_BASIC]  294.39,65.02 270 top
CLIENT31  [FTDI_BASIC]  333.76,65.02 270 top
CLIENT32  [FTDI_BASIC]  215.65,85.85 270 top
CLIENT33  [FTDI_BASIC]  255.02,85.85 270 top
CLIENT34  [FTDI_BASIC]  294.39,85.85 270 top
CLIENT35  [FTDI_BASIC]  333.76,85.85 270 top
CLIENT36  [FTDI_BASIC]  215.65,106.68 270 top
CLIENT37  [FTDI_BASIC]  255.02,106.68 270 top
CLIENT38  [FTDI_BASIC]  294.39,106.68 270 top
CLIENT39  [FTDI_BASIC]  333.76,106.68 270 top
CLIENT40  [FTDI_BASIC]  44.45,141.22 270 top
CLIENT41  [FTDI_BASIC]  83.82,141.22 270 top
CLIENT42  [FTDI_BASIC]  123.19,141.22 270 top
CLIENT43  [FTDI_BASIC]  162.56,141.22 270 top
CLIENT44  [FTDI_BASIC]  44.45,162.05 270 top
CLIENT45  [FTDI_BASIC]  83.82,162.05 270 top
CLIENT46  [FTDI_BASIC]  123.19,162.05 270 top
CLIENT47  [FTDI_BASIC]  162.56,162.05 270 top
CLIENT48  [FTDI_BASIC]  44.45,182.88 270 top
CLIENT49  [FTDI_BASIC]  83.82,182.88 270 top
CLIENT50  [FTDI_BASIC]  123.19,182.88 270 top
CLIENT51  [FTDI_BASIC]  162.56,182.88 270 top
CLIENT52  [FTDI_BASIC]  44.45,203.71 270 top
CLIENT53  [FTDI_BASIC]  83.82,203.71 270 top
CLIENT54  [FTDI_BASIC]  123.19,203.71 270 top
CLIENT55  [FTDI_BASIC]  162.56,203.71 270 top
CLIENT56  [FTDI_BASIC]  44.45,224.54 270 top
CLIENT57  [FTDI_BASIC]  83.82,224.54 270 top
CLIENT58  [FTDI_BASIC]  123.19,224.54 270 top
CLIENT59  [FTDI_BASIC]  162.56,224.54 270 top
CLIENT60  [FTDI_BASIC]  215.65,141.22 270 top
CLIENT61  [FTDI_BASIC]  255.02,141.22 270 top
CLIENT62  [FTDI_BASIC]  294.39,141.22 270 top
CLIENT63  [FTDI_BASIC]  333.76,141.22 270 top
CLIENT64  [FTDI_BASIC]  215.65,162.05 270 top
CLIENT65  [FTDI_BASIC]  255.02,162.05 270 top
CLIENT66  [FTDI_BASIC]  294.39,162.05 270 top
CLIENT67  [FTDI_BASIC]  333.76,162.05 270 top
CLIENT68  [FTDI_BASIC]  215.65,182.88 270 top
CLIENT69  [FTDI_BASIC]  255.02,182.88 270 top
CLIENT70  [FTDI_BASIC]  294.39,182.88 270 top
CLIENT71  [FTDI_BASIC]  333.76,182.88 270 top
CLIENT72  [FTDI_BASIC]  215.65,203.71 270 top
CLIENT73  [FTDI_BASIC]  255.02,203.71 270 top
CLIENT74  [FTDI_BASIC]  294.39,203.71 270 top
CLIENT75  [FTDI_BASIC]  333.76,203.71 270 top
CLIENT76  [FTDI_BASIC]  215.65,224.54 270 top
CLIENT77  [FTDI_BASIC]  255.02,224.54 270 top
CLIENT78  [FTDI_BASIC]  294.39,224.54 270 top
CLIENT79  [FTDI_BASIC]  333.76,224.54 270 top
D1  GREEN  [LED-0603]  34.92,21.46 180 top
D2  RED  [LED-0603]  36.96,21.46 180 top
D3  GREEN  [LED-0603]  74.3,21.46 180 top
D4  GREEN  [LED-0603]  38.1,11.56 90 top
D5  RED  [LED-0603]  76.33,21.46 180 top
D6  GREEN  [LED-0603]  77.47,11.56 90 top
D7  GREEN  [LED-0603]  113.67,21.46 180 top
D8  RED  [LED-0603]  115.7,21.46 180 top
D9  GREEN  [LED-0603]  116.84,11.56 90 top
D10  GREEN  [LED-0603]  153.03,21.46 180 top
D11  RED  [LED-0603]  155.07,21.46 180 top
D12  GREEN  [LED-0603]  156.21,11.56 90 top
D13  GREEN  [LED-0603]  34.92,42.29 180 top
D14  RED  [LED-0603]  36.96,42.29 180 top
D15  GREEN  [LED-0603]  38.1,32.38 90 top
D16  GREEN  [LED-0603]  74.3,42.29 180 top
D17  RED  [LED-0603]  76.33,42.29 180 top
D18  GREEN  [LED-0603]  77.47,32.38 90 top
D19  GREEN  [LED-0603]  113.67,42.29 180 top
D20  RED  [LED-0603]  115.7,42.29 180 top
D21  GREEN  [LED-0603]  116.84,32.38 90 top
D22  GREEN  [LED-0603]  153.03,42.29 180 top
D23  RED  [LED-0603]  155.07,42.29 180 top
D24  GREEN  [LED-0603]  156.21,32.38 90 top
D25  GREEN  [LED-0603]  34.92,63.12 180 top
D26  RED  [LED-0603]  36.96,63.12 180 top
D27  GREEN  [LED-0603]  38.1,53.21 90 top
D28  GREEN  [LED-0603]  74.3,63.12 180 top
D29  RED  [LED-0603]  76.33,63.12 180 top
D30  GREEN  [LED-0603]  77.47,53.21 90 top
D31  GREEN  [LED-0603]  113.67,63.12 180 top
D32  RED  [LED-0603]  115.7,63.12 180 top
D33  GREEN  [LED-0603]  116.84,53.21 90 top
D34  GREEN  [LED-0603]  153.03,63.12 180 top
D35  RED  [LED-0603]  155.07,63.12 180 top
D36  GREEN  [LED-0603]  156.21,53.21 90 top
D37  GREEN  [LED-0603]  34.92,83.95 180 top
D38  RED  [LED-0603]  36.96,83.95 180 top
D39  GREEN  [LED-0603]  38.1,74.04 90 top
D40  GREEN  [LED-0603]  74.3,83.95 180 top
D41  RED  [LED-0603]  76.33,83.95 180 top
D42  GREEN  [LED-0603]  77.47,74.04 90 top
D43  GREEN  [LED-0603]  113.67,83.95 180 top
D44  RED  [LED-0603]  115.7,83.95 180 top
D45  GREEN  [LED-0603]  116.84,74.04 90 top
D46  GREEN  [LED-0603]  153.03,83.95 180 top
D47  RED  [LED-0603]  155.07,83.95 180 top
D48  GREEN  [LED-0603]  156.21,74.04 90 top
D49  GREEN  [LED-0603]  34.92,104.78 180 top
D50  RED  [LED-0603]  36.96,104.78 180 top
D51  GREEN  [LED-0603]  38.1,94.87 90 top
D52  GREEN  [LED-0603]  74.3,104.78 180 top
D53  RED  [LED-0603]  76.33,104.78 180 top
D54  GREEN  [LED-0603]  77.47,94.87 90 top
D55  GREEN  [LED-0603]  113.67,104.78 180 top
D56  RED  [LED-0603]  115.7,104.78 180 top
D57  GREEN  [LED-0603]  116.84,94.87 90 top
D58  GREEN  [LED-0603]  153.03,104.78 180 top
D59  RED  [LED-0603]  155.07,104.78 180 top
D60  GREEN  [LED-0603]  156.21,94.87 90 top
D61  GREEN  [LED-0603]  206.12,21.46 180 top
D62  RED  [LED-0603]  208.15,21.46 180 top
D63  GREEN  [LED-0603]  209.3,11.56 90 top
D64  GREEN  [LED-0603]  245.49,21.46 180 top
D65  RED  [LED-0603]  247.52,21.46 180 top
D66  GREEN  [LED-0603]  248.67,11.56 90 top
D67  GREEN  [LED-0603]  284.86,21.46 180 top
D68  RED  [LED-0603]  286.89,21.46 180 top
D69  GREEN  [LED-0603]  288.04,11.56 90 top
D70  GREEN  [LED-0603]  324.23,21.46 180 top
D71  RED  [LED-0603]  326.26,21.46 180 top
D72  GREEN  [LED-0603]  327.41,11.56 90 top
D73  GREEN  [LED-0603]  206.12,42.29 180 top
D74  RED  [LED-0603]  208.15,42.29 180 top
D75  GREEN  [LED-0603]  209.3,32.38 90 top
D76  GREEN  [LED-0603]  245.49,42.29 180 top
D77  RED  [LED-0603]  247.52,42.29 180 top
D78  GREEN  [LED-0603]  248.67,32.38 90 top
D79  GREEN  [LED-0603]  284.86,42.29 180 top
D80  RED  [LED-0603]  286.89,42.29 180 top
D81  GREEN  [LED-0603]  288.04,32.38 90 top
D82  GREEN  [LED-0603]  324.23,42.29 180 top
D83  RED  [LED-0603]  326.26,42.29 180 top
D84  GREEN  [LED-0603]  327.41,32.38 90 top
D85  GREEN  [LED-0603]  206.12,63.12 180 top
D86  RED  [LED-0603]  208.15,63.12 180 top
D87  GREEN  [LED-0603]  209.3,53.21 90 top
D88  GREEN  [LED-0603]  245.49,63.12 180 top
D89  RED  [LED-0603]  247.52,63.12 180 top
D90  GREEN  [LED-0603]  248.67,53.21 90 top
D91  GREEN  [LED-0603]  284.86,63.12 180 top
D92  RED  [LED-0603]  286.89,63.12 180 top
D93  GREEN  [LED-0603]  288.04,53.21 90 top
D94  GREEN  [LED-0603]  324.23,63.12 180 top
D95  RED  [LED-0603]  326.26,63.12 180 top
D96  GREEN  [LED-0603]  327.41,53.21 90 top
D97  GREEN  [LED-0603]  206.12,83.95 180 top
D98  RED  [LED-0603]  208.15,83.95 180 top
D99  GREEN  [LED-0603]  209.3,74.04 90 top
D100  GREEN  [LED-0603]  245.49,83.95 180 top
D101  RED  [LED-0603]  247.52,83.95 180 top
D102  GREEN  [LED-0603]  248.67,74.04 90 top
D103  GREEN  [LED-0603]  284.86,83.95 180 top
D104  RED  [LED-0603]  286.89,83.95 180 top
D105  GREEN  [LED-0603]  288.04,74.04 90 top
D106  GREEN  [LED-0603]  324.23,83.95 180 top
D107  RED  [LED-0603]  326.26,83.95 180 top
D108  GREEN  [LED-0603]  327.41,74.04 90 top
D109  GREEN  [LED-0603]  206.12,104.78 180 top
D110  RED  [LED-0603]  208.15,104.78 180 top
D111  GREEN  [LED-0603]  209.3,94.87 90 top
D112  GREEN  [LED-0603]  245.49,104.78 180 top
D113  RED  [LED-0603]  247.52,104.78 180 top
D114  GREEN  [LED-0603]  248.67,94.87 90 top
D115  GREEN  [LED-0603]  284.86,104.78 180 top
D116  RED  [LED-0603]  286.89,104.78 180 top
D117  GREEN  [LED-0603]  288.04,94.87 90 top
D118  GREEN  [LED-0603]  324.23,104.78 180 top
D119  RED  [LED-0603]  326.26,104.78 180 top
D120  GREEN  [LED-0603]  327.41,94.87 90 top
D121  GREEN  [LED-0603]  34.92,139.32 180 top
D122  RED  [LED-0603]  36.96,139.32 180 top
D123  GREEN  [LED-0603]  38.1,129.41 90 top
D124  GREEN  [LED-0603]  74.3,139.32 180 top
D125  RED  [LED-0603]  76.33,139.32 180 top
D126  GREEN  [LED-0603]  77.47,129.41 90 top
D127  GREEN  [LED-0603]  113.67,139.32 180 top
D128  RED  [LED-0603]  115.7,139.32 180 top
D129  GREEN  [LED-0603]  116.84,129.41 90 top
D130  GREEN  [LED-0603]  153.03,139.32 180 top
D131  RED  [LED-0603]  155.07,139.32 180 top
D132  GREEN  [LED-0603]  156.21,129.41 90 top
D133  GREEN  [LED-0603]  34.92,160.15 180 top
D134  RED  [LED-0603]  36.96,160.15 180 top
D135  GREEN  [LED-0603]  38.1,150.24 90 top
D136  GREEN  [LED-0603]  74.3,160.15 180 top
D137  RED  [LED-0603]  76.33,160.15 180 top
D138  GREEN  [LED-0603]  77.47,150.24 90 top
D139  GREEN  [LED-0603]  113.67,160.15 180 top
D140  RED  [LED-0603]  115.7,160.15 180 top
D141  GREEN  [LED-0603]  116.84,150.24 90 top
D142  GREEN  [LED-0603]  153.03,160.15 180 top
D143  RED  [LED-0603]  155.07,160.15 180 top
D144  GREEN  [LED-0603]  156.21,150.24 90 top
D145  GREEN  [LED-0603]  34.92,180.97 180 top
D146  RED  [LED-0603]  36.96,180.97 180 top
D147  GREEN  [LED-0603]  38.1,171.07 90 top
D148  GREEN  [LED-0603]  74.3,180.97 180 top
D149  RED  [LED-0603]  76.33,180.97 180 top
D150  GREEN  [LED-0603]  77.47,171.07 90 top
D151  GREEN  [LED-0603]  113.67,180.97 180 top
D152  RED  [LED-0603]  115.7,180.97 180 top
D153  GREEN  [LED-0603]  116.84,171.07 90 top
D154  GREEN  [LED-0603]  153.03,180.97 180 top
D155  RED  [LED-0603]  155.07,180.97 180 top
D156  GREEN  [LED-0603]  156.21,171.07 90 top
D157  GREEN  [LED-0603]  34.92,201.8 180 top
D158  RED  [LED-0603]  36.96,201.8 180 top
D159  GREEN  [LED-0603]  38.1,191.9 90 top
D160  GREEN  [LED-0603]  74.3,201.8 180 top
D161  RED  [LED-0603]  76.33,201.8 180 top
D162  GREEN  [LED-0603]  77.47,191.9 90 top
D163  GREEN  [LED-0603]  113.67,201.8 180 top
D164  RED  [LED-0603]  115.7,201.8 180 top
D165  GREEN  [LED-0603]  116.84,191.9 90 top
D166  GREEN  [LED-0603]  153.03,201.8 180 top
D167  RED  [LED-0603]  155.07,201.8 180 top
D168  GREEN  [LED-0603]  156.21,191.9 90 top
D169  GREEN  [LED-0603]  34.92,222.63 180 top
D170  RED  [LED-0603]  36.96,222.63 180 top
D171  GREEN  [LED-0603]  38.1,212.72 90 top
D172  GREEN  [LED-0603]  74.3,222.63 180 top
D173  RED  [LED-0603]  76.33,222.63 180 top
D174  GREEN  [LED-0603]  77.47,212.72 90 top
D175  GREEN  [LED-0603]  113.67,222.63 180 top
D176  RED  [LED-0603]  115.7,222.63 180 top
D177  GREEN  [LED-0603]  116.84,212.72 90 top
D178  GREEN  [LED-0603]  153.03,222.63 180 top
D179  RED  [LED-0603]  155.07,222.63 180 top
D180  GREEN  [LED-0603]  156.21,212.72 90 top
D181  GREEN  [LED-0603]  206.12,139.32 180 top
D182  RED  [LED-0603]  208.15,139.32 180 top
D183  GREEN  [LED-0603]  209.3,129.41 90 top
D184  GREEN  [LED-0603]  245.49,139.32 180 top
D185  RED  [LED-0603]  247.52,139.32 180 top
D186  GREEN  [LED-0603]  248.67,129.41 90 top
D187  GREEN  [LED-0603]  284.86,139.32 180 top
D188  RED  [LED-0603]  286.89,139.32 180 top
D189  GREEN  [LED-0603]  288.04,129.41 90 top
D190  GREEN  [LED-0603]  324.23,139.32 180 top
D191  RED  [LED-0603]  326.26,139.32 180 top
D192  GREEN  [LED-0603]  327.41,129.41 90 top
D193  GREEN  [LED-0603]  206.12,160.15 180 top
D194  RED  [LED-0603]  208.15,160.15 180 top
D195  GREEN  [LED-0603]  209.3,150.24 90 top
D196  GREEN  [LED-0603]  245.49,160.15 180 top
D197  RED  [LED-0603]  247.52,160.15 180 top
D198  GREEN  [LED-0603]  248.67,150.24 90 top
D199  GREEN  [LED-0603]  284.86,160.15 180 top
D200  RED  [LED-0603]  286.89,160.15 180 top
D201  GREEN  [LED-0603]  288.04,150.24 90 top
D202  GREEN  [LED-0603]  324.23,160.15 180 top
D203  RED  [LED-0603]  326.26,160.15 180 top
D204  GREEN  [LED-0603]  327.41,150.24 90 top
D205  GREEN  [LED-0603]  206.12,180.97 180 top
D206  RED  [LED-0603]  208.15,180.97 180 top
D207  GREEN  [LED-0603]  209.3,171.07 90 top
D208  GREEN  [LED-0603]  245.49,180.97 180 top
D209  RED  [LED-0603]  247.52,180.97 180 top
D210  GREEN  [LED-0603]  248.67,171.07 90 top
D211  GREEN  [LED-0603]  284.86,180.97 180 top
D212  RED  [LED-0603]  286.89,180.97 180 top
D213  GREEN  [LED-0603]  288.04,171.07 90 top
D214  GREEN  [LED-0603]  324.23,180.97 180 top
D215  RED  [LED-0603]  326.26,180.97 180 top
D216  GREEN  [LED-0603]  327.41,171.07 90 top
D217  GREEN  [LED-0603]  206.12,201.8 180 top
D218  RED  [LED-0603]  208.15,201.8 180 top
D219  GREEN  [LED-0603]  209.3,191.9 90 top
D220  GREEN  [LED-0603]  245.49,201.8 180 top
D221  RED  [LED-0603]  247.52,201.8 180 top
D222  GREEN  [LED-0603]  248.67,191.9 90 top
D223  GREEN  [LED-0603]  284.86,201.8 180 top
D224  RED  [LED-0603]  286.89,201.8 180 top
D225  GREEN  [LED-0603]  288.04,191.9 90 top
D226  GREEN  [LED-0603]  324.23,201.8 180 top
D227  RED  [LED-0603]  326.26,201.8 180 top
D228  GREEN  [LED-0603]  327.41,191.9 90 top
D229  GREEN  [LED-0603]  206.12,222.63 180 top
D230  RED  [LED-0603]  208.15,222.63 180 top
D231  GREEN  [LED-0603]  209.3,212.72 90 top
D232  GREEN  [LED-0603]  245.49,222.63 180 top
D233  RED  [LED-0603]  247.52,222.63 180 top
D234  GREEN  [LED-0603]  248.67,212.72 90 top
D235  GREEN  [LED-0603]  284.86,222.63 180 top
D236  RED  [LED-0603]  286.89,222.63 180 top
D237  GREEN  [LED-0603]  288.04,212.72 90 top
D238  GREEN  [LED-0603]  324.23,222.63 180 top
D239  RED  [LED-0603]  326.26,222.63 180 top
D240  GREEN  [LED-0603]  327.41,212.72 90 top
E$1  [FIDUCIAL-1.5X3]  4.57,10.16 0 top
E$2  [FIDUCIAL-1X2]  337.44,9.4 0 top
E$3  [FIDUCIAL-1X2]  337.44,107.95 180 top
E$4  [FIDUCIAL-1.5X3]  175.77,10.16 0 top
E$5  [FIDUCIAL-1X2]  166.24,9.4 0 top
E$6  [FIDUCIAL-1X2]  166.24,127.25 0 top
E$7  [FIDUCIAL-1X2]  166.24,107.95 180 top
E$8  [FIDUCIAL-1X2]  166.24,225.81 180 top
E$9  [FIDUCIAL-1.5X3]  4.57,128.02 0 top
E$10  [FIDUCIAL-1X2]  337.44,127.25 0 top
E$11  [FIDUCIAL-1X2]  337.44,225.81 180 top
E$12  [FIDUCIAL-1.5X3]  175.77,128.02 0 top
FID1  FIDUCIAL1X2  [FIDUCIAL-1X2]  17.78,13.21 0 top
FID2  FIDUCIAL1X2  [FIDUCIAL-1X2]  38.1,25.91 0 top
FID3  FIDUCIAL1X2  [FIDUCIAL-1X2]  57.15,13.21 0 top
FID4  FIDUCIAL1X2  [FIDUCIAL-1X2]  77.47,25.91 0 top
FID5  FIDUCIAL1X2  [FIDUCIAL-1X2]  96.52,13.21 0 top
FID6  FIDUCIAL1X2  [FIDUCIAL-1X2]  116.84,25.91 0 top
FID7  FIDUCIAL1X2  [FIDUCIAL-1X2]  135.89,13.21 0 top
FID8  FIDUCIAL1X2  [FIDUCIAL-1X2]  156.21,25.91 0 top
FID9  FIDUCIAL1X2  [FIDUCIAL-1X2]  17.78,34.04 0 top
FID10  FIDUCIAL1X2  [FIDUCIAL-1X2]  38.1,46.74 0 top
FID11  FIDUCIAL1X2  [FIDUCIAL-1X2]  57.15,34.04 0 top
FID12  FIDUCIAL1X2  [FIDUCIAL-1X2]  77.47,46.74 0 top
FID13  FIDUCIAL1X2  [FIDUCIAL-1X2]  96.52,34.04 0 top
FID14  FIDUCIAL1X2  [FIDUCIAL-1X2]  116.84,46.74 0 top
FID15  FIDUCIAL1X2  [FIDUCIAL-1X2]  135.89,34.04 0 top
FID16  FIDUCIAL1X2  [FIDUCIAL-1X2]  156.21,46.74 0 top
FID17  FIDUCIAL1X2  [FIDUCIAL-1X2]  17.78,54.86 0 top
FID18  FIDUCIAL1X2  [FIDUCIAL-1X2]  38.1,67.56 0 top
FID19  FIDUCIAL1X2  [FIDUCIAL-1X2]  57.15,54.86 0 top
FID20  FIDUCIAL1X2  [FIDUCIAL-1X2]  77.47,67.56 0 top
FID21  FIDUCIAL1X2  [FIDUCIAL-1X2]  96.52,54.86 0 top
FID22  FIDUCIAL1X2  [FIDUCIAL-1X2]  116.84,67.56 0 top
FID23  FIDUCIAL1X2  [FIDUCIAL-1X2]  135.89,54.86 0 top
FID24  FIDUCIAL1X2  [FIDUCIAL-1X2]  156.21,67.56 0 top
FID25  FIDUCIAL1X2  [FIDUCIAL-1X2]  17.78,75.69 0 top
FID26  FIDUCIAL1X2  [FIDUCIAL-1X2]  38.1,88.39 0 top
FID27  FIDUCIAL1X2  [FIDUCIAL-1X2]  57.15,75.69 0 top
FID28  FIDUCIAL1X2  [FIDUCIAL-1X2]  77.47,88.39 0 top
FID29  FIDUCIAL1X2  [FIDUCIAL-1X2]  96.52,75.69 0 top
FID30  FIDUCIAL1X2  [FIDUCIAL-1X2]  116.84,88.39 0 top
FID31  FIDUCIAL1X2  [FIDUCIAL-1X2]  135.89,75.69 0 top
FID32  FIDUCIAL1X2  [FIDUCIAL-1X2]  156.21,88.39 0 top
FID33  FIDUCIAL1X2  [FIDUCIAL-1X2]  17.78,96.52 0 top
FID34  FIDUCIAL1X2  [FIDUCIAL-1X2]  38.1,109.22 0 top
FID35  FIDUCIAL1X2  [FIDUCIAL-1X2]  57.15,96.52 0 top
FID36  FIDUCIAL1X2  [FIDUCIAL-1X2]  77.47,109.22 0 top
FID37  FIDUCIAL1X2  [FIDUCIAL-1X2]  96.52,96.52 0 top
FID38  FIDUCIAL1X2  [FIDUCIAL-1X2]  116.84,109.22 0 top
FID39  FIDUCIAL1X2  [FIDUCIAL-1X2]  135.89,96.52 0 top
FID40  FIDUCIAL1X2  [FIDUCIAL-1X2]  156.21,109.22 0 top
FID41  FIDUCIAL1X2  [FIDUCIAL-1X2]  188.98,13.21 0 top
FID42  FIDUCIAL1X2  [FIDUCIAL-1X2]  209.3,25.91 0 top
FID43  FIDUCIAL1X2  [FIDUCIAL-1X2]  228.35,13.21 0 top
FID44  FIDUCIAL1X2  [FIDUCIAL-1X2]  248.67,25.91 0 top
FID45  FIDUCIAL1X2  [FIDUCIAL-1X2]  267.72,13.21 0 top
FID46  FIDUCIAL1X2  [FIDUCIAL-1X2]  288.04,25.91 0 top
FID47  FIDUCIAL1X2  [FIDUCIAL-1X2]  307.09,13.21 0 top
FID48  FIDUCIAL1X2  [FIDUCIAL-1X2]  327.41,25.91 0 top
FID49  FIDUCIAL1X2  [FIDUCIAL-1X2]  188.98,34.04 0 top
FID50  FIDUCIAL1X2  [FIDUCIAL-1X2]  209.3,46.74 0 top
FID51  FIDUCIAL1X2  [FIDUCIAL-1X2]  228.35,34.04 0 top
FID52  FIDUCIAL1X2  [FIDUCIAL-1X2]  248.67,46.74 0 top
FID53  FIDUCIAL1X2  [FIDUCIAL-1X2]  267.72,34.04 0 top
FID54  FIDUCIAL1X2  [FIDUCIAL-1X2]  288.04,46.74 0 top
FID55  FIDUCIAL1X2  [FIDUCIAL-1X2]  307.09,34.04 0 top
FID56  FIDUCIAL1X2  [FIDUCIAL-1X2]  327.41,46.74 0 top
FID57  FIDUCIAL1X2  [FIDUCIAL-1X2]  188.98,54.86 0 top
FID58  FIDUCIAL1X2  [FIDUCIAL-1X2]  209.3,67.56 0 top
FID59  FIDUCIAL1X2  [FIDUCIAL-1X2]  228.35,54.86 0 top
FID60  FIDUCIAL1X2  [FIDUCIAL-1X2]  248.67,67.56 0 top
FID61  FIDUCIAL1X2  [FIDUCIAL-1X2]  267.72,54.86 0 top
FID62  FIDUCIAL1X2  [FIDUCIAL-1X2]  288.04,67.56 0 top
FID63  FIDUCIAL1X2  [FIDUCIAL-1X2]  307.09,54.86 0 top
FID64  FIDUCIAL1X2  [FIDUCIAL-1X2]  327.41,67.56 0 top
FID65  FIDUCIAL1X2  [FIDUCIAL-1X2]  188.98,75.69 0 top
FID66  FIDUCIAL1X2  [FIDUCIAL-1X2]  209.3,88.39 0 top
FID67  FIDUCIAL1X2  [FIDUCIAL-1X2]  228.35,75.69 0 top
FID68  FIDUCIAL1X2  [FIDUCIAL-1X2]  248.67,88.39 0 top
FID69  FIDUCIAL1X2  [FIDUCIAL-1X2]  267.72,75.69 0 top
FID70  FIDUCIAL1X2  [FIDUCIAL-1X2]  288.04,88.39 0 top
FID71  FIDUCIAL1X2  [FIDUCIAL-1X2]  307.09,75.69 0 top
FID72  FIDUCIAL1X2  [FIDUCIAL-1X2]  327.41,88.39 0 top
FID73  FIDUCIAL1X2  [FIDUCIAL-1X2]  188.98,96.52 0 top
FID74  FIDUCIAL1X2  [FIDUCIAL-1X2]  209.3,109.22 0 top
FID75  FIDUCIAL1X2  [FIDUCIAL-1X2]  228.35,96.52 0 top
FID76  FIDUCIAL1X2  [FIDUCIAL-1X2]  248.67,109.22 0 top
FID77  FIDUCIAL1X2  [FIDUCIAL-1X2]  267.72,96.52 0 top
FID78  FIDUCIAL1X2  [FIDUCIAL-1X2]  288.04,109.22 0 top
FID79  FIDUCIAL1X2  [FIDUCIAL-1X2]  307.09,96.52 0 top
FID80  FIDUCIAL1X2  [FIDUCIAL-1X2]  327.41,109.22 0 top
FID81  FIDUCIAL1X2  [FIDUCIAL-1X2]  17.78,131.06 0 top
FID82  FIDUCIAL1X2  [FIDUCIAL-1X2]  38.1,143.76 0 top
FID83  FIDUCIAL1X2  [FIDUCIAL-1X2]  57.15,131.06 0 top
FID84  FIDUCIAL1X2  [FIDUCIAL-1X2]  77.47,143.76 0 top
FID85  FIDUCIAL1X2  [FIDUCIAL-1X2]  96.52,131.06 0 top
FID86  FIDUCIAL1X2  [FIDUCIAL-1X2]  116.84,143.76 0 top
FID87  FIDUCIAL1X2  [FIDUCIAL-1X2]  135.89,131.06 0 top
FID88  FIDUCIAL1X2  [FIDUCIAL-1X2]  156.21,143.76 0 top
FID89  FIDUCIAL1X2  [FIDUCIAL-1X2]  17.78,151.89 0 top
FID90  FIDUCIAL1X2  [FIDUCIAL-1X2]  38.1,164.59 0 top
FID91  FIDUCIAL1X2  [FIDUCIAL-1X2]  57.15,151.89 0 top
FID92  FIDUCIAL1X2  [FIDUCIAL-1X2]  77.47,164.59 0 top
FID93  FIDUCIAL1X2  [FIDUCIAL-1X2]  96.52,151.89 0 top
FID94  FIDUCIAL1X2  [FIDUCIAL-1X2]  116.84,164.59 0 top
FID95  FIDUCIAL1X2  [FIDUCIAL-1X2]  135.89,151.89 0 top
FID96  FIDUCIAL1X2  [FIDUCIAL-1X2]  156.21,164.59 0 top
FID97  FIDUCIAL1X2  [FIDUCIAL-1X2]  17.78,172.72 0 top
FID98  FIDUCIAL1X2  [FIDUCIAL-1X2]  38.1,185.42 0 top
FID99  FIDUCIAL1X2  [FIDUCIAL-1X2]  57.15,172.72 0 top
FID100  FIDUCIAL1X2  [FIDUCIAL-1X2]  77.47,185.42 0 top
FID101  FIDUCIAL1X2  [FIDUCIAL-1X2]  96.52,172.72 0 top
FID102  FIDUCIAL1X2  [FIDUCIAL-1X2]  116.84,185.42 0 top
FID103  FIDUCIAL1X2  [FIDUCIAL-1X2]  135.89,172.72 0 top
FID104  FIDUCIAL1X2  [FIDUCIAL-1X2]  156.21,185.42 0 top
FID105  FIDUCIAL1X2  [FIDUCIAL-1X2]  17.78,193.55 0 top
FID106  FIDUCIAL1X2  [FIDUCIAL-1X2]  38.1,206.25 0 top
FID107  FIDUCIAL1X2  [FIDUCIAL-1X2]  57.15,193.55 0 top
FID108  FIDUCIAL1X2  [FIDUCIAL-1X2]  77.47,206.25 0 top
FID109  FIDUCIAL1X2  [FIDUCIAL-1X2]  96.52,193.55 0 top
FID110  FIDUCIAL1X2  [FIDUCIAL-1X2]  116.84,206.25 0 top
FID111  FIDUCIAL1X2  [FIDUCIAL-1X2]  135.89,193.55 0 top
FID112  FIDUCIAL1X2  [FIDUCIAL-1X2]  156.21,206.25 0 top
FID113  FIDUCIAL1X2  [FIDUCIAL-1X2]  17.78,214.38 0 top
FID114  FIDUCIAL1X2  [FIDUCIAL-1X2]  38.1,227.08 0 top
FID115  FIDUCIAL1X2  [FIDUCIAL-1X2]  57.15,214.38 0 top
FID116  FIDUCIAL1X2  [FIDUCIAL-1X2]  77.47,227.08 0 top
FID117  FIDUCIAL1X2  [FIDUCIAL-1X2]  96.52,214.38 0 top
FID118  FIDUCIAL1X2  [FIDUCIAL-1X2]  116.84,227.08 0 top
FID119  FIDUCIAL1X2  [FIDUCIAL-1X2]  135.89,214.38 0 top
FID120  FIDUCIAL1X2  [FIDUCIAL-1X2]  156.21,227.08 0 top
FID121  FIDUCIAL1X2  [FIDUCIAL-1X2]  188.98,131.06 0 top
FID122  FIDUCIAL1X2  [FIDUCIAL-1X2]  209.3,143.76 0 top
FID123  FIDUCIAL1X2  [FIDUCIAL-1X2]  228.35,131.06 0 top
FID124  FIDUCIAL1X2  [FIDUCIAL-1X2]  248.67,143.76 0 top
FID125  FIDUCIAL1X2  [FIDUCIAL-1X2]  267.72,131.06 0 top
FID126  FIDUCIAL1X2  [FIDUCIAL-1X2]  288.04,143.76 0 top
FID127  FIDUCIAL1X2  [FIDUCIAL-1X2]  307.09,131.06 0 top
FID128  FIDUCIAL1X2  [FIDUCIAL-1X2]  327.41,143.76 0 top
FID129  FIDUCIAL1X2  [FIDUCIAL-1X2]  188.98,151.89 0 top
FID130  FIDUCIAL1X2  [FIDUCIAL-1X2]  209.3,164.59 0 top
FID131  FIDUCIAL1X2  [FIDUCIAL-1X2]  228.35,151.89 0 top
FID132  FIDUCIAL1X2  [FIDUCIAL-1X2]  248.67,164.59 0 top
FID133  FIDUCIAL1X2  [FIDUCIAL-1X2]  267.72,151.89 0 top
FID134  FIDUCIAL1X2  [FIDUCIAL-1X2]  288.04,164.59 0 top
FID135  FIDUCIAL1X2  [FIDUCIAL-1X2]  307.09,151.89 0 top
FID136  FIDUCIAL1X2  [FIDUCIAL-1X2]  327.41,164.59 0 top
FID137  FIDUCIAL1X2  [FIDUCIAL-1X2]  188.98,172.72 0 top
FID138  FIDUCIAL1X2  [FIDUCIAL-1X2]  209.3,185.42 0 top
FID139  FIDUCIAL1X2  [FIDUCIAL-1X2]  228.35,172.72 0 top
FID140  FIDUCIAL1X2  [FIDUCIAL-1X2]  248.67,185.42 0 top
FID141  FIDUCIAL1X2  [FIDUCIAL-1X2]  267.72,172.72 0 top
FID142  FIDUCIAL1X2  [FIDUCIAL-1X2]  288.04,185.42 0 top
FID143  FIDUCIAL1X2  [FIDUCIAL-1X2]  307.09,172.72 0 top
FID144  FIDUCIAL1X2  [FIDUCIAL-1X2]  327.41,185.42 0 top
FID145  FIDUCIAL1X2  [FIDUCIAL-1X2]  188.98,193.55 0 top
FID146  FIDUCIAL1X2  [FIDUCIAL-1X2]  209.3,206.25 0 top
FID147  FIDUCIAL1X2  [FIDUCIAL-1X2]  228.35,193.55 0 top
FID148  FIDUCIAL1X2  [FIDUCIAL-1X2]  248.67,206.25 0 top
FID149  FIDUCIAL1X2  [FIDUCIAL-1X2]  267.72,193.55 0 top
FID150  FIDUCIAL1X2  [FIDUCIAL-1X2]  288.04,206.25 0 top
FID151  FIDUCIAL1X2  [FIDUCIAL-1X2]  307.09,193.55 0 top
FID152  FIDUCIAL1X2  [FIDUCIAL-1X2]  327.41,206.25 0 top
FID153  FIDUCIAL1X2  [FIDUCIAL-1X2]  188.98,214.38 0 top
FID154  FIDUCIAL1X2  [FIDUCIAL-1X2]  209.3,227.08 0 top
FID155  FIDUCIAL1X2  [FIDUCIAL-1X2]  228.35,214.38 0 top
FID156  FIDUCIAL1X2  [FIDUCIAL-1X2]  248.67,227.08 0 top
FID157  FIDUCIAL1X2  [FIDUCIAL-1X2]  267.72,214.38 0 top
FID158  FIDUCIAL1X2  [FIDUCIAL-1X2]  288.04,227.08 0 top
FID159  FIDUCIAL1X2  [FIDUCIAL-1X2]  307.09,214.38 0 top
FID160  FIDUCIAL1X2  [FIDUCIAL-1X2]  327.41,227.08 0 top
HOST  [FTDI_DEVICE_SIDE]  24.13,8.13 0 top
HOST1  [FTDI_DEVICE_SIDE]  63.5,8.13 0 top
HOST2  [FTDI_DEVICE_SIDE]  102.87,8.13 0 top
HOST3  [FTDI_DEVICE_SIDE]  142.24,8.13 0 top
HOST4  [FTDI_DEVICE_SIDE]  24.13,28.96 0 top
HOST5  [FTDI_DEVICE_SIDE]  63.5,28.96 0 top
HOST6  [FTDI_DEVICE_SIDE]  102.87,28.96 0 top
HOST7  [FTDI_DEVICE_SIDE]  142.24,28.96 0 top
HOST8  [FTDI_DEVICE_SIDE]  24.13,49.78 0 top
HOST9  [FTDI_DEVICE_SIDE]  63.5,49.78 0 top
HOST10  [FTDI_DEVICE_SIDE]  102.87,49.78 0 top
HOST11  [FTDI_DEVICE_SIDE]  142.24,49.78 0 top
HOST12  [FTDI_DEVICE_SIDE]  24.13,70.61 0 top
HOST13  [FTDI_DEVICE_SIDE]  63.5,70.61 0 top
HOST14  [FTDI_DEVICE_SIDE]  102.87,70.61 0 top
HOST15  [FTDI_DEVICE_SIDE]  142.24,70.61 0 top
HOST16  [FTDI_DEVICE_SIDE]  24.13,91.44 0 top
HOST17  [FTDI_DEVICE_SIDE]  63.5,91.44 0 top
HOST18  [FTDI_DEVICE_SIDE]  102.87,91.44 0 top
HOST19  [FTDI_DEVICE_SIDE]  142.24,91.44 0 top
HOST20  [FTDI_DEVICE_SIDE]  195.33,8.13 0 top
HOST21  [FTDI_DEVICE_SIDE]  234.7,8.13 0 top
HOST22  [FTDI_DEVICE_SIDE]  274.07,8.13 0 top
HOST23  [FTDI_DEVICE_SIDE]  313.44,8.13 0 top
HOST24  [FTDI_DEVICE_SIDE]  195.33,28.96 0 top
HOST25  [FTDI_DEVICE_SIDE]  234.7,28.96 0 top
HOST26  [FTDI_DEVICE_SIDE]  274.07,28.96 0 top
HOST27  [FTDI_DEVICE_SIDE]  313.44,28.96 0 top
HOST28  [FTDI_DEVICE_SIDE]  195.33,49.78 0 top
HOST29  [FTDI_DEVICE_SIDE]  234.7,49.78 0 top
HOST30  [FTDI_DEVICE_SIDE]  274.07,49.78 0 top
HOST31  [FTDI_DEVICE_SIDE]  313.44,49.78 0 top
HOST32  [FTDI_DEVICE_SIDE]  195.33,70.61 0 top
HOST33  [FTDI_DEVICE_SIDE]  234.7,70.61 0 top
HOST34  [FTDI_DEVICE_SIDE]  274.07,70.61 0 top
HOST35  [FTDI_DEVICE_SIDE]  313.44,70.61 0 top
HOST36  [FTDI_DEVICE_SIDE]  195.33,91.44 0 top
HOST37  [FTDI_DEVICE_SIDE]  234.7,91.44 0 top
HOST38  [FTDI_DEVICE_SIDE]  274.07,91.44 0 top
HOST39  [FTDI_DEVICE_SIDE]  313.44,91.44 0 top
HOST40  [FTDI_DEVICE_SIDE]  24.13,125.98 0 top
HOST41  [FTDI_DEVICE_SIDE]  63.5,125.98 0 top
HOST42  [FTDI_DEVICE_SIDE]  102.87,125.98 0 top
HOST43  [FTDI_DEVICE_SIDE]  142.24,125.98 0 top
HOST44  [FTDI_DEVICE_SIDE]  24.13,146.81 0 top
HOST45  [FTDI_DEVICE_SIDE]  63.5,146.81 0 top
HOST46  [FTDI_DEVICE_SIDE]  102.87,146.81 0 top
HOST47  [FTDI_DEVICE_SIDE]  142.24,146.81 0 top
HOST48  [FTDI_DEVICE_SIDE]  24.13,167.64 0 top
HOST49  [FTDI_DEVICE_SIDE]  63.5,167.64 0 top
HOST50  [FTDI_DEVICE_SIDE]  102.87,167.64 0 top
HOST51  [FTDI_DEVICE_SIDE]  142.24,167.64 0 top
HOST52  [FTDI_DEVICE_SIDE]  24.13,188.47 0 top
HOST53  [FTDI_DEVICE_SIDE]  63.5,188.47 0 top